# EAGLE board PCB (EAGLE 9.7.0)
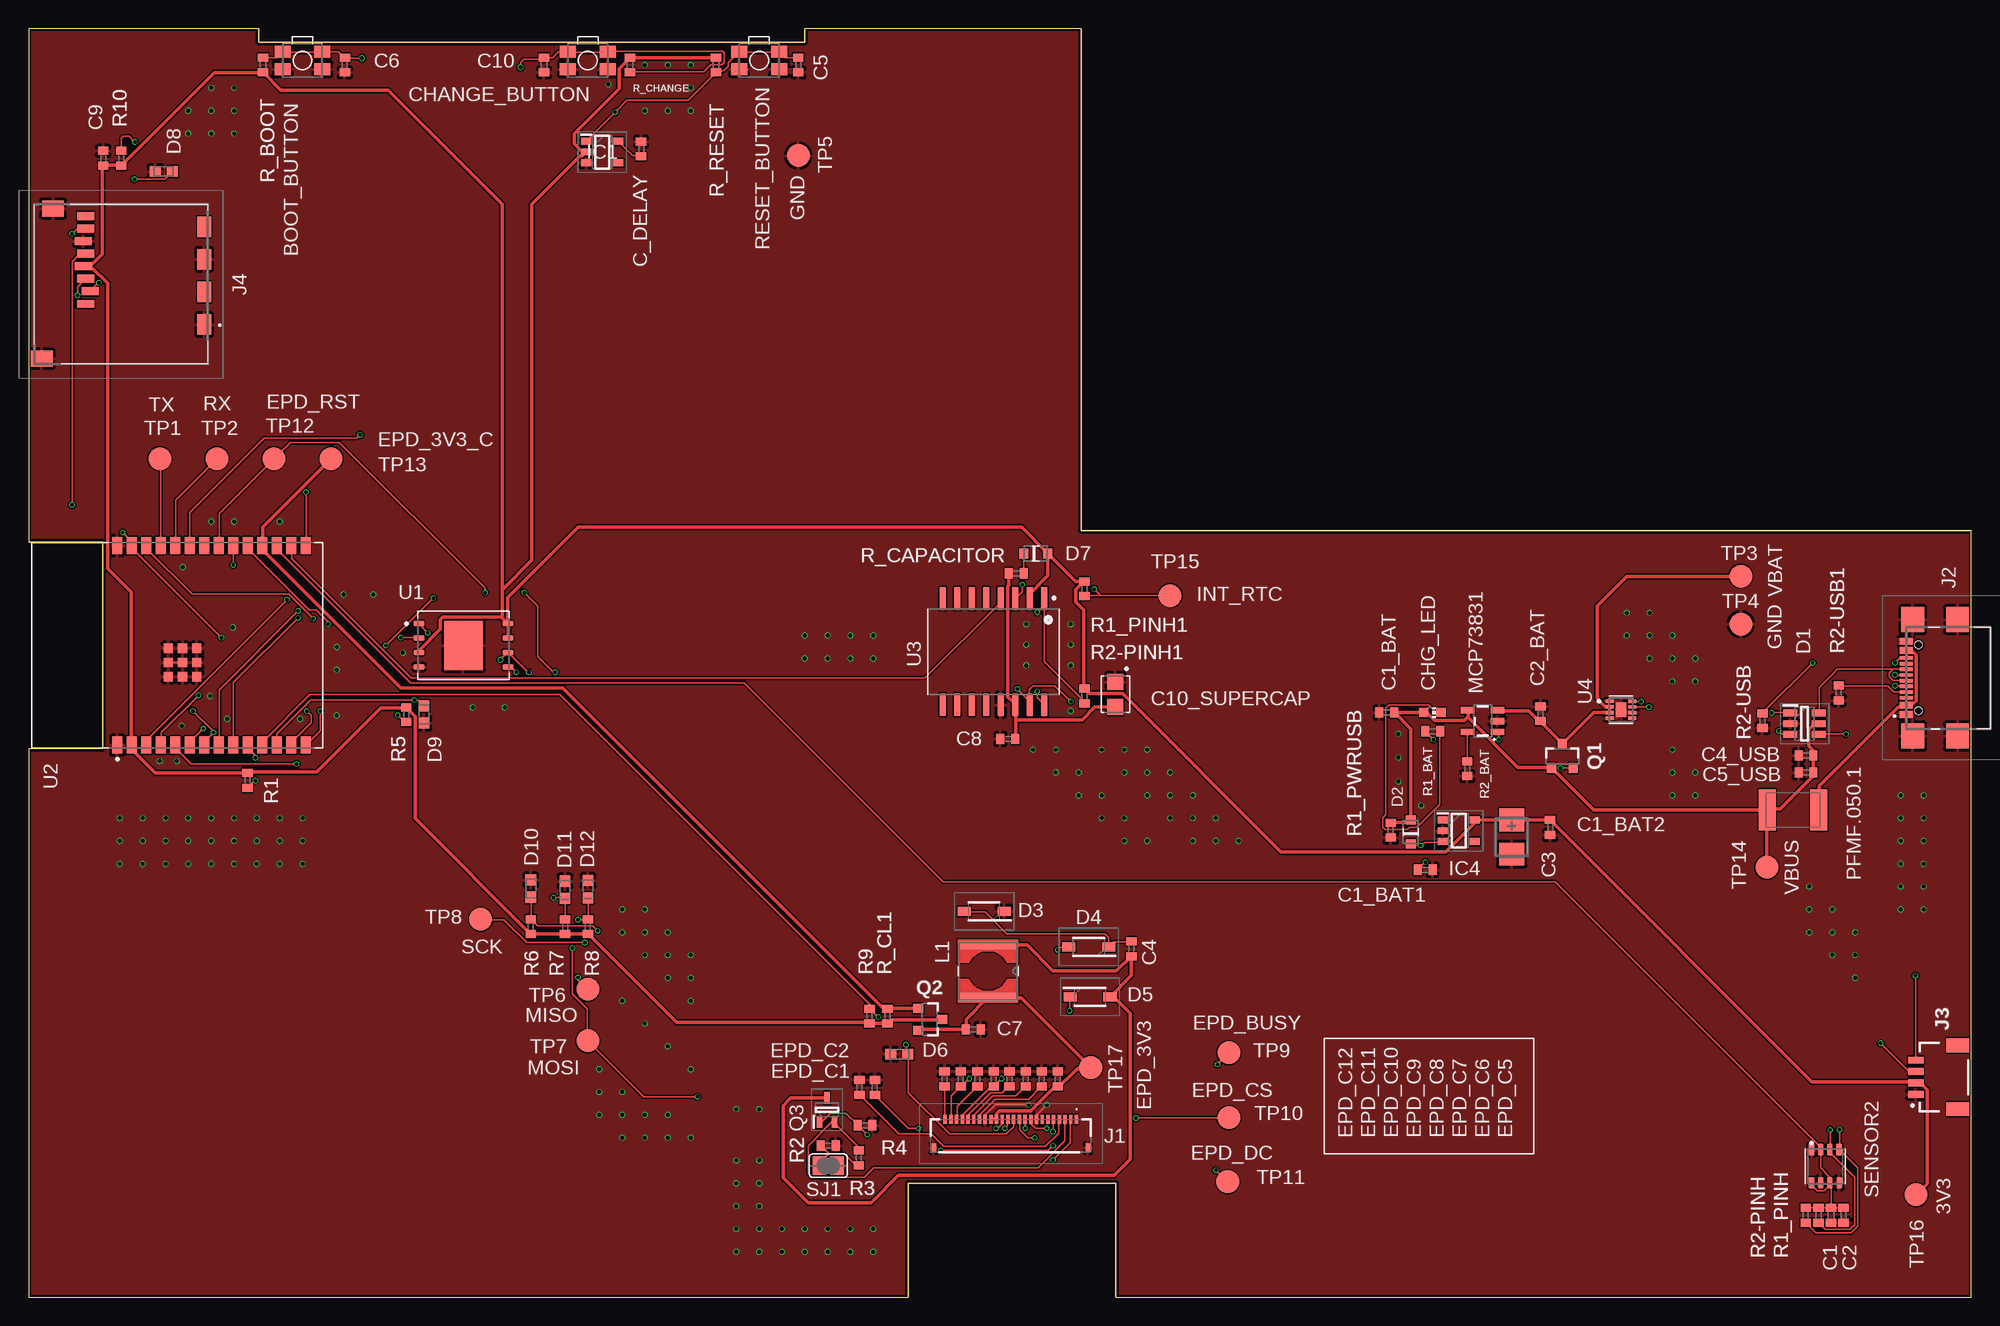
[diagram p0: board, top side]
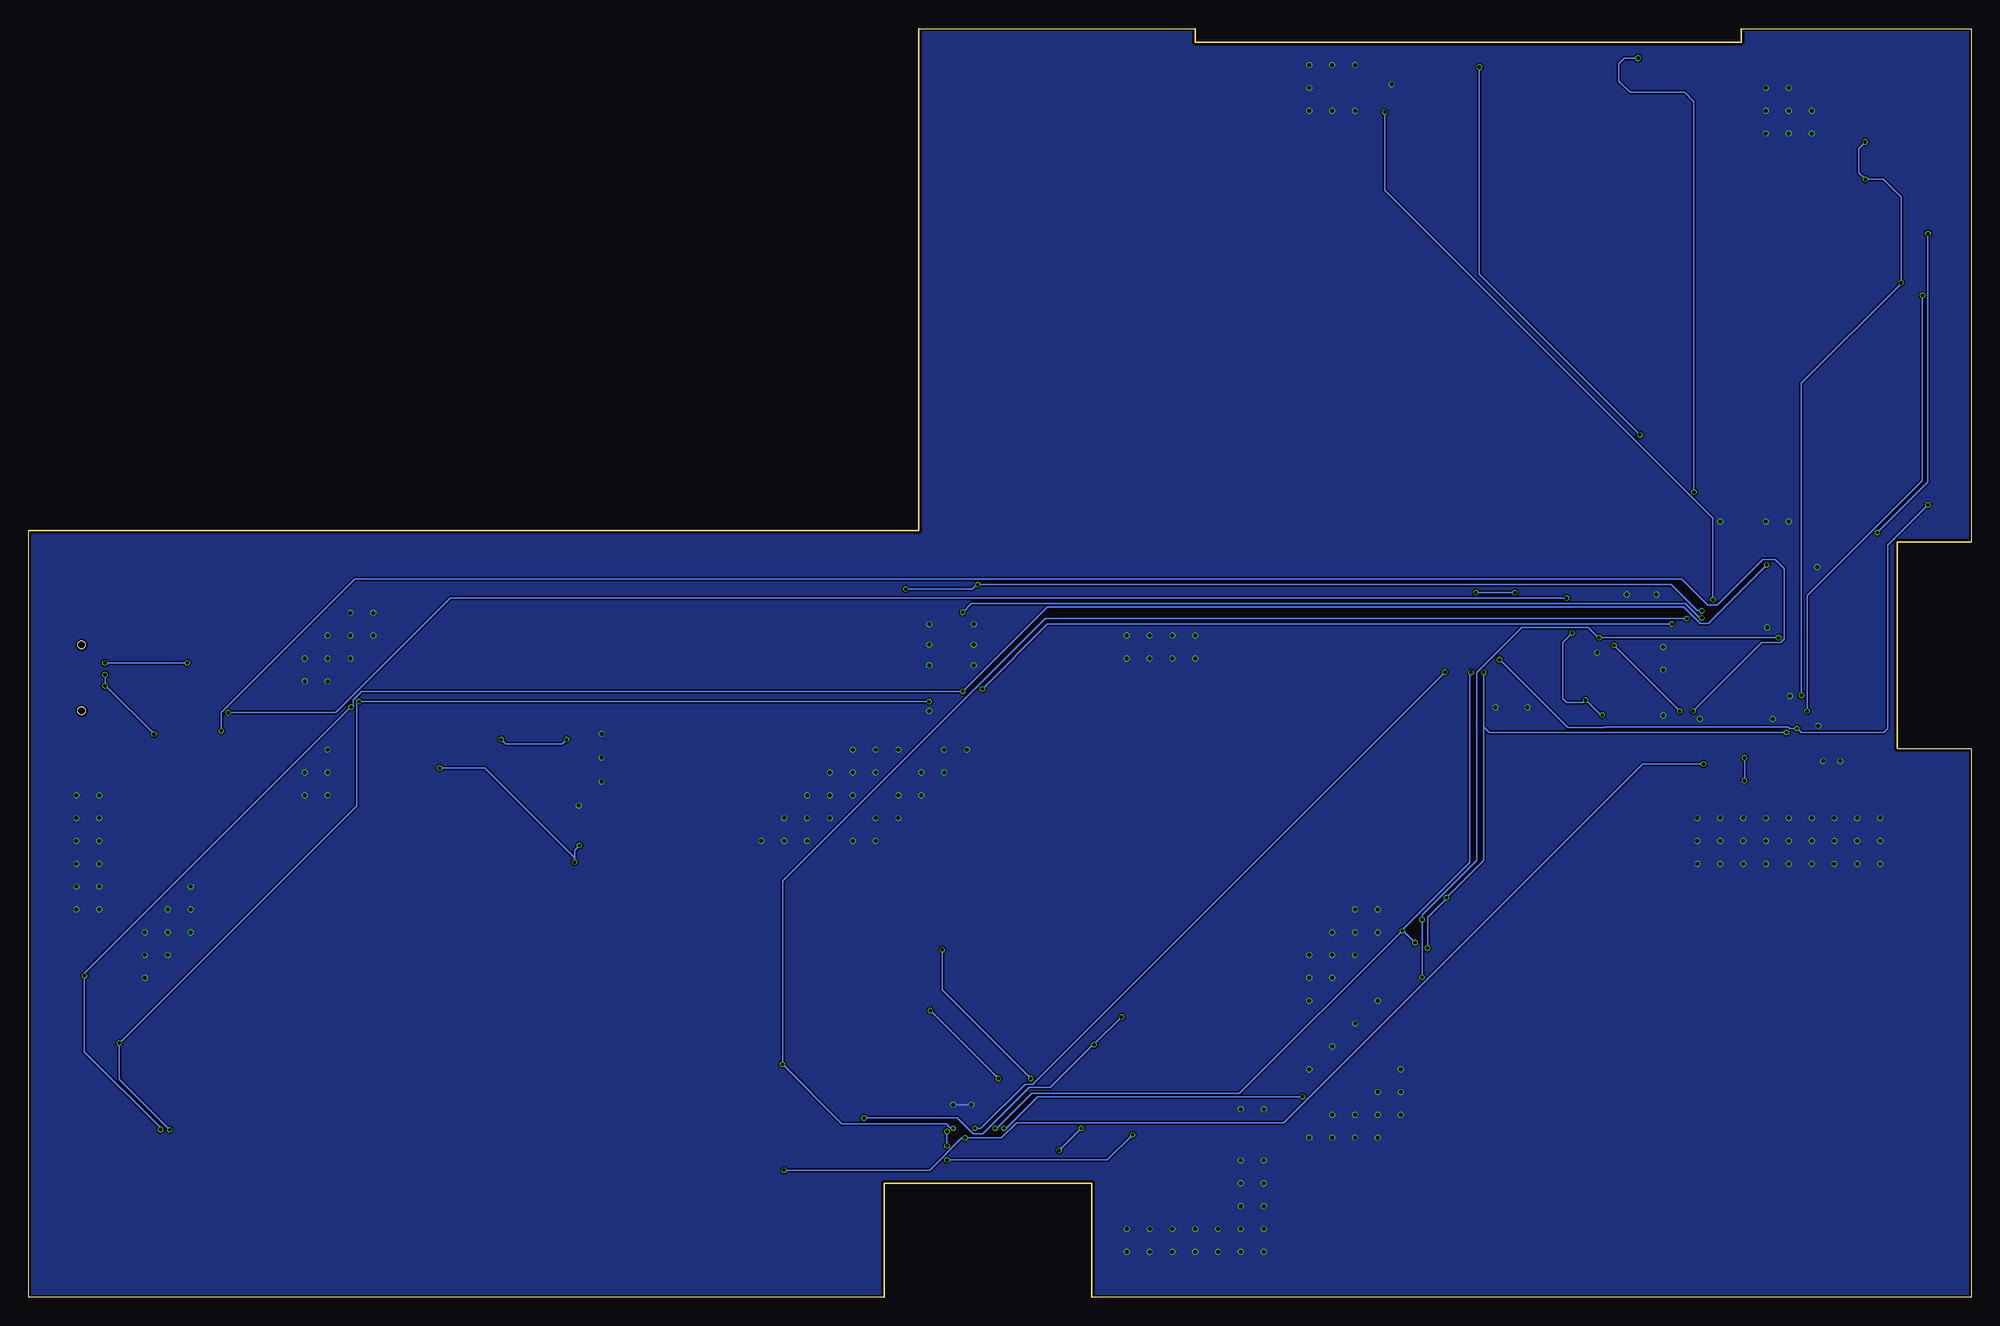
[diagram p1: board, bottom side, seen from below]

Size 170.2 x 111.2 mm. Coordinates in mm from the lower left corner, seen from the top.
Outline: 0,0 77.05,0 77.05,10 95.25,10 95.25,0 170.2,0 170.2,67.2 92.2,67.2 92.2,111.2 68,111.2 68,110 20.15,110 20.15,111.2 0,111.2 0,66.2 6.5,66.21 6.5,48.09 0,48.08 0,0
Copper layers (1*16): Top 0.035mm / dielectric 1.6mm / Bottom 0.035mm
Design rules "jlcpcb-2layers.dru *": minimum track width 5mil, minimum drill 0.3mm, track to track 5mil, track to pad 5mil, pad to pad 5mil, via to via 5mil, smd to smd 5mil, copper to edge 0.2mm, drill to drill 6mil, minimum pad ring 10mil, minimum via ring 3mil, stop-mask expansion 4mil, vias tented up to drill 0mil, thermal gap 10mil
Net classes: 0 default: width 0.15 mm; 1 POWER_NETS: width 0.3 mm

## Footprints (pad centres in the part's own frame; a part is rotated, then mirrored left to right if it is on the bottom)
MYBUTTON = smd 1.4 x 1.05: 1 1.75,0.75; 2 -1.75,0.75; 3 -1.75,-0.75; 4 1.75,-0.75
ESP32_WROVER_EAGLE-LTSPICE_C0402 = smd 0.7 x 0.9: 1 -0.65,0; 2 0.65,0
RCL_CT3528 = smd 2 x 2.2: + -1.5,0; - 1.5,0
CAPCP3225X100N = smd 1.4 x 1.4: 1 -1.1,0; 2 1.1,0
ADAFRUIT_CHIP-LED0603 = smd 0.8 x 0.8: A 0,-0.75; C 0,0.75
SOT95P280X145-6N = smd 1.2 x 0.6: 1 -1.25,0.95; 2 -1.25,0; 3 -1.25,-0.95; 4 1.25,-0.95; 5 1.25,0; 6 1.25,0.95
ESP32_WROVER_AVX---SD0805S020S1R0_AVX_SD0805S020S1R0_0 = smd 0.8 x 0.9: 1 -1.05,0; 2 1.05,0
SOD3716X135N = smd 1.15 x 0.8: 1 -1.75,0; 2 1.75,0
DIOC1608X36N = smd 0.97 x 0.94: 1 -0.75,0; 2 0.75,0
SOT95P280X125-5N = smd 0.9 x 0.6: 1 -1.4,0.95; 2 -1.4,0; 3 -1.4,-0.95; 4 1.4,-0.95; 5 1.4,0.95
SOT95P280X120-5N = smd 0.9 x 0.6: 1 -1.4,0.95; 2 -1.4,0; 3 -1.4,-0.95; 4 1.4,-0.95; 5 1.4,0.95
FH34SRJ24S05SH99 = smd 0.3 x 0.8: 1 5.75,1.45; 2 5.25,1.45; 3 4.75,1.45; 4 4.25,1.45; 5 3.75,1.45; 6 3.25,1.45; 7 2.75,1.45; 8 2.25,1.45; 9 1.75,1.45; 10 1.25,1.45; 11 0.75,1.45; 12 0.25,1.45; 13 -0.25,1.45; 14 -0.75,1.45; 15 -1.25,1.45; 16 -1.75,1.45; 17 -2.25,1.45; 18 -2.75,1.45; 19 -3.25,1.45; 20 -3.75,1.45; 21 -4.25,1.45; 22 -4.75,1.45; 23 -5.25,1.45; 24 -5.75,1.45 | smd 0.4 x 0.8: MP1 6.75,-1.05; MP2 -6.75,-1.05
SAMACSYS_PARTS_USB4110GFA = smd 0.3 x 1.15: A1 -3.35,3.678; A4 -2.55,3.678; A5 -1.25,3.678; A6 -0.25,3.678; A7 0.25,3.678; A8 1.25,3.678; A9 2.55,3.678; A12 3.35,3.678; B1 3.05,3.678; B4 2.25,3.678; B5 1.75,3.678; B6 0.75,3.678; B7 -0.75,3.678; B8 -1.75,3.678; B9 -2.25,3.678; B12 -3.05,3.678 | smd 2.18 x 2: MP1 -5.11,-0.827; MP2 5.11,-0.827; MP3 -5.11,3.103; MP4 5.11,3.103 | hole 0.65: -2.89,2.603; 2.89,2.603
JST04_1MM_RA = smd 0.6 x 1.35: 1 -1.5,0; 2 -0.5,0; 3 0.5,0; 4 1.5,0 | smd 1.2 x 2: NC1 2.8,-3.675; NC2 -2.8,-3.675
112ATAARR03ATTEND = smd 1.8 x 1.2: G1 10.6,10.4; G2 4.9,10.4; S1 7.75,10.4; S2 2.05,10.4 | smd 1.4 x 1.9: G3 13.6,-3.85; G4 0.45,-2.85 | smd 0.7 x 1.5: P1 8.8,0; P2 7.7,0.4; P3 6.6,0; P4 5.5,-0.2; P5 4.4,0; P6 3.3,-0.2; P7 2.2,0; P8 1.1,0
IND_4828-WE-TPC_WRE = smd 0.762 x 5.08: 1 -2.286,0; 2 2.286,0
ESP32_WROVER_SPARKFUN-IC-POWER_SOT23-5 = smd 0.55 x 1.2: 1 -0.95,-1.3; 2 0,-1.3; 3 0.95,-1.3; 4 0.95,1.3; 5 -0.95,1.3
ESP32C6_VARISTOR_CT/CN1812 = smd 1.5 x 3.6: 1 -2.25,0; 2 2.25,0
ESP32_WROVER_SPARKFUN-DISCRETESEMI_SOT23-3 = smd 0.8 x 0.9: 1 -0.95,-1; 2 0.95,-1; 3 0,1.1
SOT65P210X110-3N = smd 1.05 x 0.5: 1 -1.05,0.65; 2 -1.05,-0.65; 3 1.05,0
ESP32_WROVER_EAGLE-LTSPICE_R0402 = smd 0.7 x 0.9: 1 -0.65,0; 2 0.65,0
ESP32_WROVER_BME680_PSON80P300X300X100-8N = smd 1.016 x 0.5: 1 1.458,1.2; 2 1.458,0.4; 3 1.458,-0.4; 4 1.458,-1.2; 5 -1.458,-1.22; 6 -1.458,-0.4; 7 -1.458,0.4; 8 -1.458,1.2
SJ = smd 1.168 x 1.6: 1 -0.762,0; 2 0.762,0
TP20R = smd 2 x 2: TP 0,0
SON127P600X800X80-9N = smd 0.94 x 0.44: 1 -3.895,1.905; 2 -3.895,0.635; 3 -3.895,-0.635; 4 -3.895,-1.905; 5 3.895,-1.905; 6 3.895,-0.635; 7 3.895,0.635; 8 3.895,1.905 | smd 3.4 x 4.3: 9 0,0
XCVR_ESP32-C6-WROOM-1-N8 = smd 1.5 x 0.9: 1 -8.75,5.26; 2 -8.75,3.99; 3 -8.75,2.72; 4 -8.75,1.45; 5 -8.75,0.18; 6 -8.75,-1.09; 7 -8.75,-2.36; 8 -8.75,-3.63; 9 -8.75,-4.9; 10 -8.75,-6.17; 11 -8.75,-7.44; 12 -8.75,-8.71; 13 -8.75,-9.98; 14 -8.75,-11.25; 15 8.75,-11.25; 16 8.75,-9.98; 17 8.75,-8.71; 18 8.75,-7.44; 19 8.75,-6.17; 20 8.75,-4.9; 21 8.75,-3.63; 22 8.75,-2.36; 23 8.75,-1.09; 24 8.75,0.18; 25 8.75,1.45; 26 8.75,2.72; 27 8.75,3.99; 28 8.75,5.26 | smd 0.8 x 0.8: 29_1 -2.755,0.79; 29_2 -1.505,0.79; 29_3 -0.255,0.79; 29_4 -2.755,-0.46; 29_5 -1.505,-0.46; 29_6 -0.255,-0.46; 29_7 -2.755,-1.71; 29_8 -1.505,-1.71; 29_9 -0.255,-1.71
SOIC127P1032X265-16N = smd 2.05 x 0.59: 1 -4.655,4.445; 2 -4.655,3.175; 3 -4.655,1.905; 4 -4.655,0.635; 5 -4.655,-0.635; 6 -4.655,-1.905; 7 -4.655,-3.175; 8 -4.655,-4.445; 9 4.655,-4.445; 10 4.655,-3.175; 11 4.655,-1.905; 12 4.655,-0.635; 13 4.655,0.635; 14 4.655,1.905; 15 4.655,3.175; 16 4.655,4.445
SON50P200X200X80-9N = smd 0.76 x 0.27: 1 -0.985,0.75; 4 -0.985,-0.75; 5 0.985,-0.75; 6 0.985,-0.25; 7 0.985,0.25; 8 0.985,0.75 | smd 0.76 x 0.3: 2 -0.985,0.25; 3 -0.985,-0.25 | smd 0.9 x 1.3: 9 0,0

## Placement (x,y rotation side)
BOOT_BUTTON  BUTTON_CUSYOMV1  [MYBUTTON]  24,108.4 180 top
C1  100nF  [ESP32_WROVER_EAGLE-LTSPICE_C0402]  157.9,7.2 270 top
C1_BAT  4.7uF  [ESP32_WROVER_EAGLE-LTSPICE_C0402]  118.99,51.26 180 top
C1_BAT1  4.7uF  [ESP32_WROVER_EAGLE-LTSPICE_C0402]  122.35,37.48 0 top
C1_BAT2  4.7uF  [ESP32_WROVER_EAGLE-LTSPICE_C0402]  133.29,41.18 270 top
C2  100nF  [ESP32_WROVER_EAGLE-LTSPICE_C0402]  159,7.2 270 top
C2_BAT  4.7uF  [ESP32_WROVER_EAGLE-LTSPICE_C0402]  132.45,51.16 90 top
C3  100uF  [RCL_CT3528]  129.93,40.34 270 top
C4  4.7uF/25V  [ESP32_WROVER_EAGLE-LTSPICE_C0402]  96.61,30.55 270 top
C4_USB  100nF  [ESP32_WROVER_EAGLE-LTSPICE_C0402]  155.7,47.5 180 top
C5  1uF  [ESP32_WROVER_EAGLE-LTSPICE_C0402]  67.43,108 270 top
C5_USB  4.7uF  [ESP32_WROVER_EAGLE-LTSPICE_C0402]  155.7,46 180 top
C6  100nF  [ESP32_WROVER_EAGLE-LTSPICE_C0402]  27.71,108 270 top
C7  10uF  [ESP32_WROVER_EAGLE-LTSPICE_C0402]  82.75,23.49 0 top
C8  100nF  [ESP32_WROVER_EAGLE-LTSPICE_C0402]  85.79,48.94 180 top
C9  100nF  [ESP32_WROVER_EAGLE-LTSPICE_C0402]  6.55,99.83 90 top
C10  100nF  [ESP32_WROVER_EAGLE-LTSPICE_C0402]  45.15,108 270 top
C10_SUPERCAP  CPH3225A  [CAPCP3225X100N]  95.2,52.85 270 top
C_DELAY  100nF  [ESP32_WROVER_EAGLE-LTSPICE_C0402]  53.66,100.65 90 top
CHANGE_BUTTON  BUTTON_CUSYOMV1  [MYBUTTON]  49,108.4 180 top
CHG_LED  [ADAFRUIT_CHIP-LED0603]  122.98,51.25 270 top
D1  USBLC6-2SC6Y  [SOT95P280X145-6N]  155.58,50.28 0 top
D2  ESP32_WROVER_AVX---SD0805S020S1R0_AVX_SD0805S020S1R0_0_0AVX_SD0805S020S1R0_0_0  [ESP32_WROVER_AVX---SD0805S020S1R0_AVX_SD0805S020S1R0_0]  121.09,40.79 90 top
D3  MBR0530  [SOD3716X135N]  83.71,33.83 180 top
D4  MBR0530  [SOD3716X135N]  92.87,30.72 180 top
D5  MBR0530  [SOD3716X135N]  92.99,26.34 0 top
D6  PGB1010603MR  [DIOC1608X36N]  76.28,21.33 0 top
D7  ESP32_WROVER_AVX---SD0805S020S1R0_AVX_SD0805S020S1R0_0_0AVX_SD0805S020S1R0_0_0  [ESP32_WROVER_AVX---SD0805S020S1R0_AVX_SD0805S020S1R0_0]  88.24,65.19 0 top
D8  PGB1010603MR  [DIOC1608X36N]  11.85,98.67 0 top
D9  PGB1010603MR  [DIOC1608X36N]  34.64,51.08 90 top
D10  PGB1010603MR  [DIOC1608X36N]  44,35.83 270 top
D11  PGB1010603MR  [DIOC1608X36N]  47,35.73 270 top
D12  PGB1010603MR  [DIOC1608X36N]  49,35.78 270 top
EPD_C1  1uF/50V  [ESP32_WROVER_EAGLE-LTSPICE_C0402]  72.79,18.41 90 top
EPD_C2  1uF/50V  [ESP32_WROVER_EAGLE-LTSPICE_C0402]  74.14,18.41 90 top
EPD_C5  0.1uF/50V  [ESP32_WROVER_EAGLE-LTSPICE_C0402]  90.15,19.15 90 top
EPD_C6  1uF/50V  [ESP32_WROVER_EAGLE-LTSPICE_C0402]  88.75,19.15 90 top
EPD_C7  1uF/50V  [ESP32_WROVER_EAGLE-LTSPICE_C0402]  87.36,19.15 90 top
EPD_C8  1uF/50V  [ESP32_WROVER_EAGLE-LTSPICE_C0402]  85.93,19.15 90 top
EPD_C9  1uF/50V  [ESP32_WROVER_EAGLE-LTSPICE_C0402]  84.54,19.15 90 top
EPD_C10  1uF/50V  [ESP32_WROVER_EAGLE-LTSPICE_C0402]  83.12,19.15 90 top
EPD_C11  1uF/50V  [ESP32_WROVER_EAGLE-LTSPICE_C0402]  81.66,19.15 90 top
EPD_C12  1uF/50V  [ESP32_WROVER_EAGLE-LTSPICE_C0402]  80.25,19.15 90 top
IC1  BD5229G-TR  [SOT95P280X125-5N]  50.25,100.38 0 top
IC4  XC6220A331MR-G  [SOT95P280X120-5N]  125.28,40.9 0 top
J1  FH34SRJ-24S-0.5SH_99_  [FH34SRJ24S05SH99]  86.05,14.15 0 top
J2  SAMACSYS_PARTS_USB4110-GF-A  [SAMACSYS_PARTS_USB4110GFA]  168.16,54.3 90 top
J3  QWIIC_RIGHT_ANGLE  [JST04_1MM_RA]  165.32,19.3 90 top
J4  112A-TAAR-R03_ATTEND  [112ATAARR03ATTEND]  5,95.87 270 top
L1  68uH  [IND_4828-WE-TPC_WRE]  84.05,28.6 270 top
MCP73831  ESP32_WROVER_SPARKFUN-IC-POWER_MCP73831  [ESP32_WROVER_SPARKFUN-IC-POWER_SOT23-5]  127.38,50.5 90 top
PFMF.050.1  ESP32C6_VARISTORCN1812  [ESP32C6_VARISTOR_CT/CN1812]  154.57,42.72 180 top
Q1  20V/4.2A/52mΩ/1.4W  [ESP32_WROVER_SPARKFUN-DISCRETESEMI_SOT23-3]  134.36,47.41 0 top
Q2  20V/4.2A/52mΩ/1.4W  [ESP32_WROVER_SPARKFUN-DISCRETESEMI_SOT23-3]  78.93,24.37 270 top
Q3  SI1308EDL-T1-GE3  [SOT65P210X110-3N]  69.94,16.44 90 top
R1  10K  [ESP32_WROVER_EAGLE-LTSPICE_R0402]  19.19,45.32 270 top
R1_BAT  200  [ESP32_WROVER_EAGLE-LTSPICE_R0402]  123.01,49.61 0 top
R1_PINH  10K  [ESP32_WROVER_EAGLE-LTSPICE_R0402]  156.8,7.2 90 top
R1_PINH1  10K  [ESP32_WROVER_EAGLE-LTSPICE_R0402]  92.5,62.1 90 top
R1_PWRUSB  100K  [ESP32_WROVER_EAGLE-LTSPICE_R0402]  119.32,40.95 90 top
R2  2.2  [ESP32_WROVER_EAGLE-LTSPICE_R0402]  70.05,13.3 180 top
R2-PINH  10K  [ESP32_WROVER_EAGLE-LTSPICE_R0402]  155.68,7.2 90 top
R2-PINH1  10K  [ESP32_WROVER_EAGLE-LTSPICE_R0402]  92.5,52.7 90 top
R2-USB  5k1  [ESP32_WROVER_EAGLE-LTSPICE_R0402]  151.89,50.54 270 top
R2-USB1  5k1  [ESP32_WROVER_EAGLE-LTSPICE_R0402]  158.57,52.98 90 top
R2_BAT  2K  [ESP32_WROVER_EAGLE-LTSPICE_R0402]  126.03,46.34 90 top
R3  0.47  [ESP32_WROVER_EAGLE-LTSPICE_R0402]  72.72,12.25 270 top
R4  10K  [ESP32_WROVER_EAGLE-LTSPICE_R0402]  73.27,15.1 0 top
R5  10K  [ESP32_WROVER_EAGLE-LTSPICE_R0402]  33.08,51.07 90 top
R6  10K  [ESP32_WROVER_EAGLE-LTSPICE_R0402]  44,32.5 270 top
R7  10K  [ESP32_WROVER_EAGLE-LTSPICE_R0402]  47,32.5 270 top
R8  10K  [ESP32_WROVER_EAGLE-LTSPICE_R0402]  49,32.5 270 top
R9  10K  [ESP32_WROVER_EAGLE-LTSPICE_R0402]  73.68,24.65 270 top
R10  10K  [ESP32_WROVER_EAGLE-LTSPICE_R0402]  8.13,99.83 270 top
R_BOOT  10K  [ESP32_WROVER_EAGLE-LTSPICE_R0402]  20.54,108 90 top
R_CAPACITOR  15  [ESP32_WROVER_EAGLE-LTSPICE_R0402]  86.52,63.45 0 top
R_CHANGE  10K  [ESP32_WROVER_EAGLE-LTSPICE_R0402]  52.69,108 270 top
R_CL1  10K  [ESP32_WROVER_EAGLE-LTSPICE_R0402]  75.25,24.65 90 top
R_RESET  10K  [ESP32_WROVER_EAGLE-LTSPICE_R0402]  60.22,108 270 top
RESET_BUTTON  BUTTON_CUSYOMV1  [MYBUTTON]  64,108.4 180 top
SENSOR2  ESP32_WROVER_BME680_BME680  [ESP32_WROVER_BME680_PSON80P300X300X100-8N]  157.39,11.5 90 top
SJ1  [SJ]  70.06,11.55 180 top
TP1  TPTP20R  [TP20R]  11.5,73.5 0 top
TP2  TPTP20R  [TP20R]  16.5,73.5 0 top
TP3  TPTP20R  [TP20R]  150,63.2 0 top
TP4  TPTP20R  [TP20R]  150,59 0 top
TP5  TPTP20R  [TP20R]  67.43,100.06 0 top
TP6  TPTP20R  [TP20R]  49,27 0 top
TP7  TPTP20R  [TP20R]  49,22.5 0 top
TP8  TPTP20R  [TP20R]  39.6,33.15 0 top
TP9  TPTP20R  [TP20R]  105.15,21.45 0 top
TP10  TPTP20R  [TP20R]  105.15,15.75 0 top
TP11  TPTP20R  [TP20R]  105.05,10.15 0 top
TP12  TPTP20R  [TP20R]  21.5,73.5 0 top
TP13  TPTP20R  [TP20R]  26.5,73.5 0 top
TP14  TPTP20R  [TP20R]  152.28,37.7 0 top
TP15  TPTP20R  [TP20R]  100,61.5 0 top
TP16  TPTP20R  [TP20R]  165.35,9 0 top
TP17  TPTP20R  [TP20R]  93.05,20.15 0 top
U1  W25Q512JVEIQ  [SON127P600X800X80-9N]  38.1,57.15 0 top
U2  ESP32-C6-WROOM-1-N8  [XCVR_ESP32-C6-WROOM-1-N8]  13.03,57.15 90 top
U3  DS3231SN#  [SOIC127P1032X265-16N]  84.53,56.59 270 top
U4  MAX17048G+T10  [SON50P200X200X80-9N]  139.5,51.5 0 top

## Library data of the parts
BOOT_BUTTON C1_BAT C1_BAT1 C1_BAT2 C2_BAT C4 C5_USB CHANGE_BUTTON CHG_LED EPD_C1 EPD_C2 EPD_C6-EPD_C12 PFMF.050.1 R1_BAT R1_PWRUSB R2-USB R2-USB1 RESET_BUTTON SJ1 TP1-TP17 = DeskAssistant v19 v1
C1 C2 C4_USB C5-C10 C_DELAY EPD_C5 = DeskAssistant v19 v1; SPICEMODEL: NONE; SPICEPREFIX: C
C3 = DeskAssistant v19 v1; SPICEPREFIX: C
C10_SUPERCAP = DeskAssistant v19 v1; AVAILABILITY: Not in stock; CHECK_PRICES: https://www.snapeda.com/parts/CPH3225A/Seiko+Instruments/view-part/?ref=eda; DESCRIPTION: 11 mF (EDLC) Supercapacitor 3.3 V 1210 (3225 Metric) - -; MF: Seiko Instruments; MP: CPH3225A; PACKAGE: 1210 Seiko; PRICE: None; PURCHASE-URL: https://www.snapeda.com/api/url_track_click_mouser/?unipart_id=562593&manufacturer=Seiko Instruments&part_name=CPH3225A&search_term=None; SNAPEDA_LINK: https://www.snapeda.com/parts/CPH3225A/Seiko+Instruments/view-part/?ref=snap
D1 = DeskAssistant v19 v1; AVAILABILITY: In Stock; CHECK_PRICES: https://www.snapeda.com/parts/USBLC6-2SC6Y/STMicroelectronics/view-part/?ref=eda; DESCRIPTION: 17V Clamp 5A (8/20µs) Ipp Tvs Diode Surface Mount SOT-23-6; MF: STMicroelectronics; MP: USBLC6-2SC6Y; PACKAGE: SOT-23-6 STMicroelectronics; PRICE: None; SNAPEDA_LINK: https://www.snapeda.com/parts/USBLC6-2SC6Y/STMicroelectronics/view-part/?ref=snap
D2 D7 = DeskAssistant v19 v1; CENTROID_NOT_SPECIFIED: No; DATASHEET: http://datasheets.avx.com/schottky.pdf; DIGIKEY_DESCRIPTION: DIODE SCHOTTKY 20V 1A 0805; DIGIKEY_PART_NUMBER: 478-7800-1-ND; LEAD_FREE: yes; MF: AVX; MOUSER_PART_NUMBER: 581-SD0805S020S1R0; PACKAGE: 0805 (2012 metric); PREFIX: D; ROHS: yes; TEMPERATURE_RANGE_HIGH: +125°C; TEMPERATURE_RANGE_LOW: -55°C
D3-D5 = DeskAssistant v19 v1; AVAILABILITY: In Stock; CHECK_PRICES: https://www.snapeda.com/parts/MBR0530/Onsemi/view-part/?ref=eda; DESCRIPTION: Diode Schottky 30 V 500mA Surface Mount SOD-123; MF: ON Semiconductor; MP: MBR0530; PACKAGE: SOD-123-2 ON Semiconductor; PRICE: None; PURCHASE-URL: https://www.snapeda.com/api/url_track_click_mouser/?unipart_id=179458&manufacturer=ON Semiconductor&part_name=MBR0530&search_term=None; SNAPEDA_LINK: https://www.snapeda.com/parts/MBR0530/Onsemi/view-part/?ref=snap
D6 D8-D12 = DeskAssistant v19 v1; AVAILABILITY: In Stock; CHECK_PRICES: https://www.snapeda.com/parts/PGB1010603MR/Littelfuse/view-part/?ref=eda; DESCRIPTION: 150V (Typ) Clamp - Ipp Tvs Diode Surface Mount 0603 (1608 Metric); MF: Littelfuse Inc.; MP: PGB1010603MR; PACKAGE: 0603 Littelfuse Inc.; PRICE: None; PURCHASE-URL: https://www.snapeda.com/api/url_track_click_mouser/?unipart_id=5659453&manufacturer=Littelfuse Inc.&part_name=PGB1010603MR&search_term=None; SNAPEDA_LINK: https://www.snapeda.com/parts/PGB1010603MR/Littelfuse/view-part/?ref=snap
IC1 = DeskAssistant v19 v1; DESCRIPTION: Voltage Detector with Adjustable Delay Time: CMOS processes are utilized to develop high precision, low current consumption CMOS reset ICs that allow arbitrary setting of the delay time. The extensive lineup includes both Nch Open Drain and CMOS output types in a wide range of detection voltages (from 2.3V to 6.0V, in 0.1V steps), enabling selection of the ideal solution based on customer requirements. In addition, the entire series is of course both lead-free and RoHS-compliant.; HEIGHT: 1.25mm; MANUFACTURER_NAME: ROHM Semiconductor; MANUFACTURER_PART_NUMBER: BD5229G-TR; MOUSER_PART_NUMBER: 755-BD5229G-TR; MOUSER_PRICE-STOCK: https://www.mouser.co.uk/ProductDetail/ROHM-Semiconductor/BD5229G-TR?qs=4kLU8WoGk0vvnhrrYwdszw%3D%3D
IC4 = DeskAssistant v19 v1; DESCRIPTION: LDO Voltage Regulators; HEIGHT: 1.2mm; MANUFACTURER_NAME: Torex; MANUFACTURER_PART_NUMBER: XC6220A331MR-G; MOUSER_PART_NUMBER: 865-XC6220A331MR-G; MOUSER_PRICE-STOCK: https://www.mouser.co.uk/ProductDetail/Torex-Semiconductor/XC6220A331MR-G?qs=AsjdqWjXhJ8ZSWznL1J0gg%3D%3D
J1 = DeskAssistant v19 v1; DESCRIPTION: 24 Position FFC, FPC Connector Contacts, Top and Bottom 0.020" (0.50mm) Surface Mount, Right Angle; HEIGHT: 1.1mm; MANUFACTURER_NAME: Hirose; MANUFACTURER_PART_NUMBER: FH34SRJ-24S-0.5SH(99); MOUSER_PART_NUMBER: 798-FH34SRJ24S05SH99; MOUSER_PRICE-STOCK: https://www.mouser.co.uk/ProductDetail/Hirose-Connector/FH34SRJ-24S-0.5SH99?qs=vcbW%252B4%252BSTIpKBl5ap9J8Fw%3D%3D
J2 = DeskAssistant v19 v1; DESCRIPTION: CONN USB 2.0 TYPE-C R/A SMT; HEIGHT: 3.26mm; MANUFACTURER_NAME: GCT (GLOBAL CONNECTOR TECHNOLOGY); MANUFACTURER_PART_NUMBER: USB4110-GF-A; MOUSER_PART_NUMBER: 640-USB4110-GF-A; MOUSER_PRICE-STOCK: https://www.mouser.co.uk/ProductDetail/GCT/USB4110-GF-A?qs=KUoIvG%2F9IlYiZvIXQjyJeA%3D%3D
J3 = DeskAssistant v19 v1; PROD_ID: CONN-13694
J4 = DeskAssistant v19 v1; DESCRIPTION: Micro SD Card Socket, Push-Push Type, Top Mount, SMT, H=1.83mm, 10u; HEIGHT: 1.9mm; MANUFACTURER_NAME: ATTEND; MANUFACTURER_PART_NUMBER: 112A-TAAR-R03 ATTEND
L1 = DeskAssistant v19 v1; COPYRIGHT: Copyright (C) 2024 Ultra Librarian. All rights reserved.; MANUFACTURER_PART_NUMBER: 744043680; MFR_NAME: Wurth Electronics
MCP73831 = DeskAssistant v19 v1; PROD_ID: IC-09995
Q1 Q2 = DeskAssistant v19 v1; PROD_ID: TRAN-14388
Q3 = DeskAssistant v19 v1; AVAILABILITY: In Stock; CHECK_PRICES: https://www.snapeda.com/parts/SI1308EDL-T1-GE3/Vishay+Siliconix/view-part/?ref=eda; DESCRIPTION: Si1308EDL-T1-GE3 N-channel MOSFET Transistor, 1.5 A, 30 V, 3-Pin SC-70 | Siliconix / Vishay SI1308EDL-T1-GE3; MF: Vishay Siliconix; MP: SI1308EDL-T1-GE3; PACKAGE: SOT-323 Vishay Semiconductor; PRICE: None; PURCHASE-URL: https://www.snapeda.com/api/url_track_click_mouser/?unipart_id=274603&manufacturer=Vishay Siliconix&part_name=SI1308EDL-T1-GE3&search_term=None; SNAPEDA_LINK: https://www.snapeda.com/parts/SI1308EDL-T1-GE3/Vishay+Siliconix/view-part/?ref=snap
R1 R1_PINH R1_PINH1 R2 R2-PINH R2-PINH1 R2_BAT R3-R10 R_BOOT R_CAPACITOR R_CHANGE R_CL1 R_RESET = DeskAssistant v19 v1; SPICEMODEL: NONE; SPICEPREFIX: R
SENSOR2 = DeskAssistant v19 v1; AVAILABILITY: Unavailable; DESCRIPTION: Integrated Environmental Unit; MF: Bosch Sensortec; MP: BME680; PACKAGE: LGA-8 Bosch Tools; PRICE: None
U1 = DeskAssistant v19 v1; AVAILABILITY: In Stock; CHECK_PRICES: https://www.snapeda.com/parts/W25Q512JVEIQ/Winbond+Electronics/view-part/?ref=eda; DESCRIPTION: FLASH - NOR Memory IC 512Mb (64M x 8) SPI - Quad I/O 133 MHz 8-WSON (8x6); MF: Winbond Electronics; MP: W25Q512JVEIQ; PACKAGE: Package; PRICE: None; SNAPEDA_LINK: https://www.snapeda.com/parts/W25Q512JVEIQ/Winbond+Electronics/view-part/?ref=snap
U2 = DeskAssistant v19 v1; AVAILABILITY: In Stock; CHECK_PRICES: https://www.snapeda.com/parts/ESP32-C6-WROOM-1-N8/Espressif+Systems/view-part/?ref=eda; DESCRIPTION: Multiprotocol Modules ESP32-C6 module, Wi-Fi 6 in 2.4 GHz band, Bluetooth 5, Zigbee 3.0 and Thread. ESP34-WROOM Compatible - ENGINEERING SAMPLE; MF: Espressif Systems; MP: ESP32-C6-WROOM-1-N8; PACKAGE: None; PRICE: None; SNAPEDA_LINK: https://www.snapeda.com/parts/ESP32-C6-WROOM-1-N8/Espressif+Systems/view-part/?ref=snap
U3 = DeskAssistant v19 v1; AVAILABILITY: In Stock; CHECK_PRICES: https://www.snapeda.com/parts/DS3231SN%23/Analog+Devices/view-part/?ref=eda; DESCRIPTION: Extremely Accurate I²C-Integrated RTC/TCXO/Crystal; MF: Analog Devices; MP: DS3231SN#; PACKAGE: SOIC-16 Maxim; PRICE: None; PURCHASE-URL: https://www.snapeda.com/api/url_track_click_mouser/?unipart_id=99048&manufacturer=Analog Devices&part_name=DS3231SN#&search_term=None; SNAPEDA_LINK: https://www.snapeda.com/parts/DS3231SN%23/Analog+Devices/view-part/?ref=snap
U4 = DeskAssistant v19 v1; AVAILABILITY: In Stock; CHECK_PRICES: https://www.snapeda.com/parts/MAX17048G+T10/Analog+Devices/view-part/?ref=eda; DESCRIPTION: 3µA 1-Cell/2-Cell Fuel Gauge with ModelGauge; MF: Analog Devices; MP: MAX17048G+T10; PACKAGE: TDFN-8 Maxim; PRICE: None; PURCHASE-URL: https://www.snapeda.com/api/url_track_click_mouser/?unipart_id=329239&manufacturer=Analog Devices&part_name=MAX17048G+T10&search_term=None; SNAPEDA_LINK: https://www.snapeda.com/parts/MAX17048G+T10/Analog+Devices/view-part/?ref=snap

## Nets
3V3 [POWER_NETS]: C1_BAT2.1 C3.+ C9.1 D7.2 IC1.2 IC4.5 J3.2 J4.P4 Q2.3 R1.1 R1_PINH1.2 R2-PINH1.2 R5.2 R6.2 R7.2 R8.2 R9.2 R10.2 R_BOOT.1 R_CHANGE.1 R_CL1.1 R_RESET.1 TP16.TP U1.3 U1.7 U1.8 U2.2 U3.2
32KHZ: R2-PINH1.1 U2.9 U3.1
DN: D1.4 J2.A7 J2.B7
DP: D1.6 J2.A6 J2.B6
EPD_3V3 [POWER_NETS]: C7.1 EPD_C5.1 J1.15 J1.16 L1.2 Q2.2 TP17.TP
EPD_3V3_C [POWER_NETS]: Q2.1 R_CL1.2 TP13.TP U2.18
EPD_BUSY: J1.9 TP9.TP U2.26
EPD_CS: D6.2 J1.12 R9.1 TP10.TP U2.11
EPD_DC: J1.11 TP11.TP U2.5
EPD_RST: J1.10 TP12.TP U2.21
FLASH_CS: D9.2 R5.1 U1.1 U2.12
GDR: J1.2 Q3.1 R4.1
GND: BOOT_BUTTON.1 BOOT_BUTTON.2 C1.2 C1_BAT1.2 C1_BAT2.2 C1_BAT.2 C2.2 C2_BAT.2 C3.- C4_USB.2 C5.2 C5_USB.2 C6.2 C7.2 C8.2 C9.2 C10.2 C10_SUPERCAP.1 C_DELAY.2 CHANGE_BUTTON.1 CHANGE_BUTTON.2 D1.2 D3.1 D6.1 D8.1 D9.1 D10.1 D11.1 D12.1 EPD_C1.2 EPD_C2.2 EPD_C5.2 EPD_C6.2 EPD_C7.2 EPD_C8.2 EPD_C9.2 EPD_C10.2 EPD_C11.2 EPD_C12.2 IC1.3 IC4.2 J1.8 J1.17 J1.MP1 J1.MP2 J2.A1 J2.A12 J2.B1 J2.B12 J2.MP1 J2.MP2 J2.MP3 J2.MP4 J3.1 J4.G1 J4.G2 J4.G3 J4.G4 J4.P6 MCP73831.2 R1_PWRUSB.1 R2-USB1.1 R2-USB.2 R2.1 R2_BAT.1 R4.2 RESET_BUTTON.1 RESET_BUTTON.2 SENSOR2.1 SENSOR2.5 SENSOR2.7 SJ1.1 TP4.TP TP5.TP U1.4 U1.9 U2.1 U2.28 U2.29_1 U2.29_2 U2.29_3 U2.29_4 U2.29_5 U2.29_6 U2.29_7 U2.29_8 U2.29_9 U3.13 U4.1 U4.4 U4.6 U4.9
GPIO8: R1.2 U2.10
I2C_PW: C1.1 C2.1 R1_PINH.2 R2-PINH.2 SENSOR2.2 SENSOR2.6 SENSOR2.8 U2.17
INT_RTC: R1_PINH1.1 TP15.TP U2.8 U3.3
IO/BOOT: BOOT_BUTTON.3 BOOT_BUTTON.4 C6.1 R_BOOT.2 U2.15
IO/CHANGE: C10.1 CHANGE_BUTTON.3 CHANGE_BUTTON.4 R_CHANGE.2 U2.23
MISO: D12.2 J4.P7 R8.1 TP6.TP U1.2 U2.27
MOSI: D11.2 J1.14 J4.P3 R7.1 TP7.TP U1.5 U2.7
N$1: D7.1 R_CAPACITOR.2
N$3: C_DELAY.1 IC1.5
N$4: MCP73831.5 R2_BAT.2
N$5: C4.1 D3.2 D4.1
N$6: C1_BAT1.1 D2.1 IC4.1 IC4.3 Q1.2
N$7: MCP73831.1 R1_BAT.1
N$8: CHG_LED.C R1_BAT.2
N$9: EPD_C1.1 J1.4
N$10: EPD_C2.1 J1.5
N$12: EPD_C6.1 J1.18
N$13: EPD_C7.1 J1.19
N$14: EPD_C8.1 J1.20
N$16: EPD_C10.1 J1.22
N$18: EPD_C12.1 J1.24
N$22: J2.A5 R2-USB1.2
N$28: J2.B5 R2-USB.1
PREVGH: D5.1 EPD_C9.1 J1.21
PREVGL: D4.2 EPD_C11.1 J1.23
RESE: J1.3 Q3.2 R3.1
RESE': R2.2 R3.2 SJ1.2
RESET: C5.1 IC1.1 R_RESET.2 RESET_BUTTON.3 RESET_BUTTON.4 U2.3
RTC_RST: U2.16 U3.4
RX: TP2.TP U2.24
SCK: D10.2 J1.13 J4.P5 R6.1 TP8.TP U1.6 U2.6
SCL: J3.4 R2-PINH.1 SENSOR2.4 U2.20 U3.16 U4.7
SDA: J3.3 R1_PINH.1 SENSOR2.3 U2.19 U3.15 U4.8
SRC [POWER_NETS]: C4.2 D5.2 L1.1 Q3.3
SS_SD: D8.2 J4.P2 R10.1 U2.4
TX: TP1.TP U2.25
USB_D+: D1.1 U2.14
USB_D-: D1.3 U2.13
VBAT [POWER_NETS]: C2_BAT.1 MCP73831.3 Q1.3 TP3.TP U4.2 U4.3
VBUS [POWER_NETS]: C1_BAT.1 C4_USB.1 C5_USB.1 CHG_LED.A D1.5 D2.2 MCP73831.4 PFMF.050.1.2 Q1.1 R1_PWRUSB.2 TP14.TP
VRTC [POWER_NETS]: C8.1 C10_SUPERCAP.2 R_CAPACITOR.1 U3.14
VUSB [POWER_NETS]: J2.A4 J2.A9 J2.B4 J2.B9 PFMF.050.1.1

## Tracks (layer width: path | path; a pad name or v marks a point on that pad's centre or on a via)
3V3
  Top 0.3: TP16.TP 165.37,9 166.34,9.97 166.34,18.21 165.78,18.77 165.37,18.77 J3.2 165.23,18.91 156.23,18.91 133.38,41.76 C1_BAT2.1 133.24,41.83 130.05,41.83 C3.+ 129.91,41.83 126.73,41.83 IC4.5 126.66,41.69 126.66,41.55 124.17,39.06 109.69,39.06 95.84,52.91 92.93,52.91 92.59,53.25 R2-PINH1.2 92.45,53.39 92.45,60.25 91.76,60.94 91.76,62.05 92.1,62.39 92.45,62.74 | 92.45,62.74 R1_PINH1.2 | U3.2 87.74,61.29 87.74,61.7 88.95,62.91 89.29,63.25 89.29,65.21 | Q2.3 79.98,24.31 75.55,24.31 75.34,24.1 R_CL1.1 75.21,24.03 73.68,24.03 R9.2 73.54,24.1 56.78,24.1 49.1,31.79 R8.2 48.96,31.86 47.09,31.86 R7.2 46.95,31.86 44.04,31.86 R6.2 43.9,31.92 33.86,41.97 33.86,50.9 33.17,51.59 R5.2 33.03,51.66 30.85,51.66 25.25,46.05 19.32,46.05 R1.1 19.18,45.98 11.08,45.98 9.07,47.99 9.07,48.34 U2.2 9,48.54 9,61.82 6.93,63.89 6.93,76.3 6.93,77.21 6.93,88.88 5.5,90.31 J4.P4 4.85,90.37 5.4,90.37 6.44,91.41 6.44,99.1 C9.1 6.58,99.23 8.1,99.23 R10.2 8.24,99.31 16.27,107.34 20.5,107.34 R_BOOT.1 22.09,105.8 23.6,105.8 31.49,105.8 41.48,95.81 41.48,77.21 | 41.41,59.62 36.29,59.62 36.08,59.42 36.08,58.59 34.21,56.72 34.21,56.58 U1.3 | 41.41,59.62 41.97,59.07 U1.8 | U1.7 42.03,57.82 42.03,58.93 U1.8 | R_RESET.1 60.18,108.65 52.84,108.65 R_CHANGE.1 51.73,107.68 51.73,106.75 51.73,105.93 51.7,105.9 50.2,104.4 47.8,102 47.8,101.1 48.52,100.38 IC1.2 48.48,100.01 48.28,100.01 44.1,95.82 44.1,64.62 41.48,62 | 41.48,77.21 41.48,62 | 41.48,77.21 41.48,64.19 41.48,62 | 41.48,62 41.48,59.76 41.41,59.62 | 89.29,65.21 D7.2 91.74,62.74 92.45,62.74 | 89.29,65.21 87,67.5 48.14,67.5 41.99,61.35 U1.8
32KHZ  (via drill 0.3)
  Top 0.15: 88.99,60.7 88.99,60.04 88.99,55.75 92.45,52.28 92.45,52.08 R2-PINH1.1 | 88.99,60.7 88.99,61.22 U3.1 | v23.61,59.55 17.94,53.88 U2.9 | v88.36,60.04 88.99,60.66 88.99,60.7
  Bottom 0.15: v23.61,59.55 23.82,59.55 25.07,60.8 87.6,60.8 v88.36,60.04
DN  (via drill 0.3)
  Top 0.15: v163.5,53.6 164.47,53.6 J2.B7 | v163.5,54.57 164.47,54.57 J2.A7 | v159.21,49.38 156.85,49.38 D1.4
  Bottom 0.15: v163.5,54.57 v163.5,53.6 163.43,53.6 v159.21,49.38
DP
  Top 0.15: 163.36,55.05 163.01,54.71 163.01,54.43 163.36,54.08 164.47,54.08 J2.A6 | 163.36,55.05 164.47,55.05 J2.B6 | D1.6 156.85,51.24 156.85,53.45 158.04,54.63 158.46,55.05 163.36,55.05
EPD_3V3
  Top 0.3: Q2.2 77.97,23.48 82.06,23.48 C7.1 82.13,23.61 82.13,24.38 84,26.25 | 84,26.25 L1.2 | J1.16 84.35,15.65 84.76,15.65 J1.15 84.83,15.79 84.83,16.14 85.04,16.34 87.81,16.34 89.96,18.49 90.09,18.49 EPD_C5.1 90.3,18.49 91.51,19.7 91.89,20.08 93.04,20.08 TP17.TP 86.95,26.25 84,26.25
EPD_3V3_C
  Top 0.3: Q2.1 77.91,25.35 75.28,25.35 R_CL1.2 75.14,25.41 74.79,25.41 46.81,53.39 32.62,53.39 20.57,65.44 20.57,65.79 U2.18 20.5,65.93 20.5,67.52 26.45,73.47 TP13.TP
EPD_BUSY  (via drill 0.3)
  Top 0.15: v89.19,14.82 88.22,14.82 87.81,15.23 87.81,15.58 J1.9 | v104.15,20.43 105.12,21.4 TP9.TP | v24.93,59.49 22.78,61.63 14.34,61.63 10.32,65.65 10.32,65.86 U2.26
  Bottom 0.15: v89.19,14.82 89.4,14.82 89.82,15.23 98.96,15.23 v104.15,20.43 104.15,36.49 81.16,59.49 v24.93,59.49
EPD_CS  (via drill 0.3)
  Top 0.15: J1.12 86.28,15.58 86.28,14.96 85.66,14.34 80.68,14.34 77.08,17.94 77.08,21.33 D6.2 77.01,21.4 76.87,21.54 v76.87,22.16 | v74.44,24.58 74.37,24.58 73.68,25.28 R9.1 73.78,25.4 73.78,25.58 46.52,52.84 24.65,52.84 20.5,48.68 20.5,48.41 U2.11 | v97.02,15.72 105.12,15.72 TP10.TP
  Bottom 0.15: v74.44,24.58 v76.87,22.16 76.94,22.16 80.68,18.42 82.55,18.42 86.63,14.34 87.46,14.34 88.85,15.72 v97.02,15.72
EPD_DC  (via drill 0.3)
  Top 0.15: v88.16,13.99 87.53,13.99 86.84,14.68 86.84,15.58 J1.11 | v104.01,11.15 104.98,10.18 TP11.TP | v23.48,46.74 14.27,46.74 12.88,48.13 12.88,48.34 U2.5
  Bottom 0.15: v104.01,11.15 91.27,11.15 88.43,13.99 v88.16,13.99 88.09,13.99 84.97,13.99 83.65,15.3 60.25,15.3 28.81,46.74 v23.48,46.74
EPD_RST  (via drill 0.3)
  Top 0.15: v87.32,14.82 87.32,15.58 J1.10 | v43.43,61.77 44.63,60.57 44.63,56.19 46.03,54.79 v46.13,54.79 | v40,61.77 40,62.17 27.2,74.92 22.91,74.92 21.54,73.54 TP12.TP 21.47,73.47 16.69,68.7 16.69,65.93 U2.21
  Bottom 0.15: v87.32,14.82 86.77,14.82 82.89,18.7 82.22,18.7 v46.13,54.79 | v40,61.77 v43.43,61.77
FLASH_CS  (via drill 0.3)
  Top 0.15: v32.34,51.04 32.89,50.48 33.03,50.48 R5.1 | D9.2 34.62,51.87 34.14,52.35 v33.79,52.35 33.73,52.35 24.72,52.35 21.74,49.38 U2.12 | v34.97,58.24 34.21,59 U1.1
  Bottom 0.15: v32.34,51.04 32.48,51.04 v33.79,52.35 33.86,52.35 34.07,52.15 35.46,52.15 35.8,52.49 35.8,57.41 v34.97,58.24
GDR  (via drill 0.3)
  Top 0.15: v89.75,12.05 91.27,13.57 91.27,15.58 J1.2 | v73.47,14.27 72.64,15.1 R4.1 72.57,15.17 71.61,16.14 70.22,16.14 69.53,15.44 69.32,15.44 Q3.1
  Bottom 0.15: v89.75,12.05 75.69,12.05 v73.47,14.27
GND  (via drill 0.35)
  Top 0.15: J1.17 83.8,16 84.7,16.9 v87.6,16.9 | J1.8 88.3,16 v89.2,16.9 | U2.29_2 U2.29_5 | J2.B12 J2.A1
  Bottom 0.15: v87.6,16.9 v89.2,16.9
  other vias: 8,42 10,42 12,42 14,42 16,42 18,42 20,42 22,42 24,42 24,40 22,40 20,40 18,40 16,40 14,40 12,40 10,40 8,40 8,38 10,38 12,38 14,38 16,38 18,38 20,38 22,38 24,38 64,12 62,12 62,10 64,10 64,8 62,8 66,6 68,6 72,6 70,6 74,6 74,4 72,4 70,4 68,4 66,4 64,4 64,6 62,6 62,4 52,34 54,32 54,34 56,32 56,30 56,28 58,30 58,28 58,26 54,30 52,32 52,26 54,24 56,22 58,20 52,18 54,16 50,20 50,18 50,16 52,16 52,14 54,14 56,16 56,14 58,14 142,60 144,58 140,60 140,58 142,58 142,56 144,56 146,56 146,54 144,54 164,44 166,44 164,42 166,42 166,40 164,40 164,38 166,38 164,36 166,36 166,34 164,34 16,104 18,104 18,102 16,102 14,104 16,106 14,102 18,106 96,48 98,48 100,46 98,46 100,44 102,44 102,42 104,42 104,40 106,40 88,48 90,46 92,44 94,42 96,40 98,40 96,42 94,44 92,46 90,48 94,48 96,46 98,44 100,42 102,40 58,106 58,108 54,108 56,108 54,104 56,104 58,104 18,68 16,68 22,68 27,57 27,55 27,51 11.5,47 13,47 13.5,64 15.9,52.7 13.4,50.1 17.4,50.7 23.8,50.7 120,49.4 120,47.3 120,45.2 122,43.1 91.3,51.4 62,16.5 64,16.5 38.9,51.7 41.7,51.7 17.9,58.7 27.6,61.6 30.2,61.6 144,48 144,46 144,44 146,46 146,44 156,36 156,34 156,32 158,34 158,32 158,30 160,32 160,30 160,28 91.3,55.4 91.3,59 91.3,57.2 87.4,57.2 87.4,55.4 87.4,59 50.8,106.3 32.8,56.5 74,56 74,58 72,56 72,58 68,58 68,56 70,56 70,58
  pour Top: 68.04,109.94 68.02,109.92 20.13,109.92 20.1,109.94 20.08,109.96 20.07,109.98 20.07,111.12 0.08,111.12 0.08,66.28 6.48,66.29 6.48,66.29 6.5,66.29 6.52,66.29 6.52,66.29 6.52,66.29 6.53,66.28 6.54,66.27 6.54,66.27 6.54,66.27 6.55,66.26 6.56,66.25 6.56,66.25 6.56,66.25 6.57,66.24 6.58,66.23 6.58,66.23 6.58,66.23 6.58,66.21 6.58,66.19 6.58,66.19 6.58,48.09 6.58,48.07 6.58,48.07 6.58,48.07 6.57,48.06 6.56,48.05 6.56,48.05 6.56,48.05 6.55,48.04 6.54,48.03 6.54,48.03 6.54,48.03 6.53,48.02 6.52,48.01 6.52,48.01 6.52,48.01 6.5,48.01 0.08,48 0.08,0.08 76.97,0.08 76.97,10.02 76.99,10.04 77.01,10.06 77.03,10.08 95.27,10.08 95.29,10.06 95.31,10.04 95.33,10.02 95.33,0.08 170.12,0.08 170.12,67.12 92.18,67.12 92.16,67.14 92.14,67.16 92.12,67.18 92.12,111.12 68.08,111.12 68.08,109.98 68.06,109.96
  pour Bottom: 68.04,109.94 68.02,109.92 20.13,109.92 20.1,109.94 20.08,109.96 20.07,109.98 20.07,111.12 0.08,111.12 0.08,66.28 6.48,66.29 6.48,66.29 6.5,66.29 6.52,66.29 6.52,66.29 6.52,66.29 6.53,66.28 6.54,66.27 6.54,66.27 6.54,66.27 6.55,66.26 6.56,66.25 6.56,66.25 6.56,66.25 6.57,66.24 6.58,66.23 6.58,66.23 6.58,66.23 6.58,66.21 6.58,66.19 6.58,66.19 6.58,48.09 6.58,48.07 6.58,48.07 6.58,48.07 6.57,48.06 6.56,48.05 6.56,48.05 6.56,48.05 6.55,48.04 6.54,48.03 6.54,48.03 6.54,48.03 6.53,48.02 6.52,48.01 6.52,48.01 6.52,48.01 6.5,48.01 0.08,48 0.08,0.08 76.97,0.08 76.97,10.02 76.99,10.04 77.01,10.06 77.03,10.08 95.27,10.08 95.29,10.06 95.31,10.04 95.33,10.02 95.33,0.08 170.12,0.08 170.12,67.12 92.18,67.12 92.16,67.14 92.14,67.16 92.12,67.18 92.12,111.12 68.08,111.12 68.08,109.98 68.06,109.96
GPIO8  (via drill 0.3)
  Top 0.15: v19.88,45.29 19.8,45.29 19.25,44.74 R1.2 | v19.88,47.3 19.88,47.51 19.25,48.13 19.25,48.34 U2.10
  Bottom 0.15: v19.88,45.29 v19.88,47.3
I2C_PW
  Top 0.15: SENSOR2.6 157.79,10.55 156.99,11.35 SENSOR2.2 156.99,13.16 133.74,36.42 80.13,36.42 62.68,53.87 33.47,53.87 21.74,65.6 U2.17 | C1.1 157.9,9.93 SENSOR2.6 | SENSOR2.6 157.79,9.84 157.29,9.33 156.69,9.33 156.19,9.84 SENSOR2.8 | R2-PINH.2 R1_PINH.2 C1.1 | C2.1 C1.1
INT_RTC  (via drill 0.3)
  Top 0.15: 93.95,61.49 TP15.TP | 93.95,61.49 93.35,61.49 92.52,61.49 R1_PINH1.1 | v23.61,60.18 16.69,53.25 16.69,48.41 U2.8 | v87.05,62.46 87.05,61.84 86.49,61.29 U3.3 | v93.35,62.07 93.93,61.49 93.95,61.49
  Bottom 0.15: v23.61,60.18 24.03,60.18 26.32,62.46 v87.05,62.46 87.12,62.46 87.51,62.07 v93.35,62.07
IO/BOOT  (via drill 0.3, 0.35)
  Top 0.15: R_BOOT.2 20.57,108.65 21.74,108.65 22.23,109.14 BOOT_BUTTON.4 22.3,109.14 25.69,109.14 BOOT_BUTTON.3 27.11,109.15 27.61,108.65 C6.1 27.76,108.6 v29.2,108.6 | v24.31,70.57 24.31,65.93 U2.15
  Bottom 0.15: v24.31,70.57 24.31,104.78 25.13,105.6 26.2,105.6 29.9,105.6 30.9,106.6 30.9,108.1 30.4,108.6 30.3,108.6 v29.2,108.6
IO/CHANGE  (via drill 0.35)
  Top 0.15: R_CHANGE.2 52.7,107.41 59.14,107.41 59.76,108.03 60.73,108.03 60.94,108.24 60.94,109.07 60.8,109.21 50.76,109.21 CHANGE_BUTTON.3 50.69,109.14 47.3,109.14 CHANGE_BUTTON.4 46.4,109.15 45.9,108.65 C10.1 45,108.5 43.4,108.5 43.1,108.2 v43.1,107.8 | U2.23 14.13,65.93 14.13,68.79 20.64,75.3 28.74,75.3 v29.04,75.6
  Bottom 0.15: v43.1,107.8 43.1,89.66 v29.04,75.6
MISO  (via drill 0.3)
  Top 0.15: D12.2 49.03,34.97 49.03,33.17 R8.1 48.96,33.1 v48.13,33.1 | v48.13,28.05 48.13,27.84 48.96,27.01 TP6.TP | v32.62,57.82 34.14,57.82 U1.2 | v16.9,57.82 9.07,65.65 9.07,65.86 U2.27 9,65.93 9,66.27 v8.24,67.03 | v3.81,93.21 4.22,93.63 4.99,93.63 J4.P7
  Bottom 0.15: v48.13,28.05 v48.13,33.1 48.13,33.17 48.13,33.52 43.35,38.3 43.35,54.78 39.4,58.72 33.59,58.72 32.69,57.82 v32.62,57.82 v16.9,57.82 | v3.81,93.21 3.81,71.47 v8.24,67.03
MOSI  (via drill 0.3)
  Top 0.15: v84.76,14.82 84.9,14.82 85.25,15.17 85.25,15.58 J1.14 | v58.59,17.59 53.88,17.59 49.03,22.44 TP7.TP 48.96,22.51 48.96,25.28 47.64,26.59 v47.64,30.61 | R7.1 47.02,33.17 47.02,34.97 D11.2 46.95,35.04 v45.98,35.04 | v42.73,54.78 42.31,55.19 42.03,55.19 U1.5 | U2.7 15.44,48.41 15.44,48.75 v16.2,49.51 16.2,49.58 v14.4,51.38 | v4.29,87.81 4.29,88.57 4.99,89.26 J4.P3
  Bottom 0.15: v84.76,14.82 84.55,14.82 81.78,17.59 v58.59,17.59 | 42.73,50 42.73,49.51 42.73,38.3 v45.98,35.04 45.98,34.97 47.64,33.31 v47.64,30.61 | 42.73,50 v42.73,54.78 | v4.29,87.81 4.29,71.61 14.4,61.49 v14.4,51.38 | 42.73,50 42.24,49.51 v16.2,49.51
N$1
  Top 0.15: R_CAPACITOR.2 87.19,63.5 87.19,65.16 D7.1
N$3
  Top 0.15: C_DELAY.1 53.6,100.07 52.91,100.07 51.66,101.31 IC1.5
N$4
  Top 0.15: R2_BAT.2 126.03,47.02 126.03,49.51 MCP73831.5
N$5
  Top 0.15: C4.1 96.6,31.16 95.08,31.16 94.67,30.75 D4.1 94.62,31.51 94.31,31.88 85.71,31.88 83.79,33.79 81.99,33.79 D3.2
N$6  (via drill 0.3)
  Top 0.15: v122.36,38.16 121.74,37.53 C1_BAT1.1 | D2.1 121.12,39.68 121.19,39.61 v121.95,39.61 122.02,39.61 122.3,39.89 123.82,39.89 IC4.3 124.03,39.96 124.58,40.51 124.58,41.27 124.03,41.83 123.89,41.83 IC4.1 | v134.21,46.4 135.25,46.4 Q1.2
  Bottom 0.15: 122.36,38.5 122.36,39.1 122.36,39.2 v121.95,39.61 | 122.36,38.5 v122.36,38.16 | v134.21,46.4 130.24,46.4 122.93,39.1 122.36,38.53 122.36,38.5
N$7  (via drill 0.3)
  Top 0.15: v123.06,48.89 122.36,49.58 R1_BAT.1 | v128.81,48.89 128.81,49.44 128.74,49.51 MCP73831.1
  Bottom 0.15: v128.81,48.89 128.41,48.49 123.46,48.49 v123.06,48.89
N$8
  Top 0.15: CHG_LED.C 123.68,51.31 123.27,51.31 122.64,51.94 119.18,51.94 118.9,51.66 118.9,42.31 118.62,42.03 118.62,41.2 118.83,41 120.77,41 120.98,41.2 121.6,41.2 123.61,43.21 123.61,49.58 R1_BAT.2
N$9
  Top 0.15: J1.4 90.23,15.58 90.23,14.4 89.06,13.23 80.19,13.23 79.08,14.34 76.24,14.34 72.85,17.73 EPD_C1.1
N$10  (via drill 0.3)
  Top 0.15: v89.75,14.54 89.75,15.58 J1.5 | v89.75,13.3 v89.74,13.3 89.33,12.88 v79.92,12.88 | v77.97,14.82 77.08,14.82 74.17,17.73 EPD_C2.1
  Bottom 0.15: v89.75,13.3 v89.75,14.54 | v77.97,14.82 v79.92,12.88
N$12
  Top 0.15: J1.18 83.31,15.65 83.31,16 84.69,17.38 87.6,17.38 88.71,18.49 EPD_C6.1
N$13
  Top 0.15: J1.19 82.82,15.65 82.82,16 84.48,17.66 86.49,17.66 87.32,18.49 EPD_C7.1
N$14
  Top 0.15: J1.20 82.34,15.65 82.34,16 84.28,17.94 85.32,17.94 85.87,18.49 EPD_C8.1
N$16
  Top 0.15: J1.22 81.37,15.65 81.37,16.76 83.1,18.49 EPD_C10.1
N$18
  Top 0.15: J1.24 80.26,15.65 EPD_C12.1
N$22
  Top 0.15: R2-USB1.2 158.58,53.6 162.88,53.6 163.41,53.06 164.48,53.06 J2.A5
N$28  (via drill 0.3)
  Top 0.15: v156.3,55.61 151.94,51.24 R2-USB.1 | v163.5,55.61 163.91,56.02 164.47,56.02 J2.B5
  Bottom 0.15: v163.5,55.61 v156.3,55.61
PREVGH  (via drill 0.3)
  Top 0.15: J1.21 81.85,15.65 81.85,16 84.35,18.49 84.48,18.49 EPD_C9.1 84.55,18.49 v85.25,19.18 | v91.2,25.14 91.2,26.32 D5.1
  Bottom 0.15: v85.25,19.18 v91.2,25.14
PREVGL  (via drill 0.3)
  Top 0.15: J1.23 80.81,15.65 80.81,17.66 81.65,18.49 EPD_C11.1 81.72,18.49 v82.41,19.18 | v90.16,30.47 90.37,30.68 91.06,30.68 D4.2
  Bottom 0.15: v90.16,30.47 90.16,26.94 v82.41,19.18
RESE
  Top 0.15: J1.3 90.79,15.58 90.79,13.71 88.43,11.36 74.03,11.36 73.2,10.53 68.63,10.53 68.29,10.86 68.29,13.3 70.36,15.37 70.57,15.37 Q3.2 70.57,15.3 72.71,13.16 72.71,12.95 R3.1
RESE'
  Top 0.15: 70.15,12.6 71.47,12.6 72.44,11.63 72.71,11.63 R3.2 | 70.15,12.6 69.46,13.3 R2.2 | SJ1.2 69.32,11.56 69.32,11.84 70.08,12.6 70.15,12.6
RESET  (via drill 0.3)
  Top 0.15: C5.1 67.38,108.65 66.27,108.65 65.79,109.14 RESET_BUTTON.3 65.72,109.14 62.33,109.14 RESET_BUTTON.4 62.24,109.15 61.29,108.2 61.29,107.89 60.88,107.48 R_RESET.2 57.77,104.9 52.7,104.9 52.41,104.9 v51.38,103.88 48.89,101.38 IC1.1 | v22.64,61.15 10.32,48.82 U2.3
  Bottom 0.15: v22.64,61.15 22.64,68.28 51.38,97.02 51.38,103.81 v51.38,103.88
RTC_RST
  Top 0.15: U2.16 23.06,65.86 23.06,64.75 33.52,54.29 78.53,54.29 85.11,60.87 85.11,61.22 U3.4
RX
  Top 0.15: U2.24 12.88,65.93 12.88,69.87 16.48,73.47 TP2.TP
SCK  (via drill 0.3)
  Top 0.15: v85.52,14.82 85.73,15.03 85.73,15.58 J1.13 | v49.86,32.13 49.44,32.55 44.6,32.55 44.04,33.1 R6.1 44.04,33.17 44.04,35.04 D10.2 | v43.84,54.78 43.77,54.78 42.03,56.51 U1.6 41.97,56.51 v41.34,55.88 | v15.3,49.86 14.13,48.68 U2.6 | v3.81,69.46 3.81,90.79 4.43,91.41 4.99,91.41 J4.P5 | v48.75,31.09 43.63,31.09 41.62,33.1 39.61,33.1 TP8.TP
  Bottom 0.15: v85.52,14.82 85.39,14.82 82.34,17.87 64.13,17.87 v49.86,32.13 | v43.84,54.78 43.94,54.68 43.94,38.13 49.86,32.2 v49.86,32.13 | v41.34,55.88 35.39,49.93 32.13,49.93 32.06,50 16.07,50 15.93,49.86 v15.3,49.86 15.23,49.86 14.89,49.51 7.69,49.51 7.34,49.86 7.34,65.93 v3.81,69.46 | v48.75,31.09 49.79,32.13 v49.86,32.13
SCL  (via drill 0.3)
  Top 0.15: R2-PINH.1 155.74,6.51 156.57,5.68 159.69,5.68 160.24,6.23 160.24,11.36 158.65,12.95 SENSOR2.4 158.65,13.02 158.65,14.7 v158.64,14.71 | v141.96,51.73 140.51,51.73 U4.7 | v165.3,28.18 165.3,20.84 J3.4 | v17.94,64.19 17.94,65.86 U2.20 | v88.36,53.12 88.36,52.56 88.92,52.01 U3.16
  Bottom 0.15: v17.94,64.19 18.33,63.8 18.34,63.8 23.07,59.07 23.75,59.07 25.21,60.52 80.95,60.52 v88.36,53.12 88.43,53.12 140.99,53.12 141.75,52.35 141.75,51.8 141.75,51.73 141.82,51.73 v141.96,51.73 165.3,28.39 v165.3,28.18 165.3,21.54 158.64,14.89 v158.64,14.71
SDA  (via drill 0.3)
  Top 0.15: R1_PINH.1 156.85,6.51 157.41,5.96 159.55,5.96 159.97,6.37 159.97,10.53 157.82,12.67 157.82,12.95 SENSOR2.3 157.82,13.02 v157.82,14.69 | v141.27,52.22 140.51,52.22 U4.8 | v162.25,22.28 164.72,19.8 165.3,19.8 J3.3 | v26.25,59 26.25,59.21 25.21,60.25 24.58,60.25 19.25,65.58 19.25,65.86 U2.19 | v86.63,53.32 87.29,52.66 87.67,52.28 87.67,52.2 | 87.67,52.2 87.67,52.01 U3.15 | v91.3,52.22 89.92,53.6 88.3,53.6 88,53.6 87.8,53.4 87.67,53.27 87.67,52.2
  Bottom 0.15: v157.82,14.69 162.25,19.11 v162.25,22.28 141.47,43.06 141.47,52.01 v141.27,52.22 141.2,52.22 v91.3,52.22 | v26.25,59 80.95,59 v86.63,53.32
SRC
  Top 0.3: Q3.3 66.79,17.49 66.6,17.3 66.1,16.8 66.1,10.6 66.1,10.5 68.3,8.3 73.8,8.3 73.9,8.4 76.2,10.7 95.1,10.7 96.5,12.1 96.5,24.9 95.8,25.6 95.06,26.34 D5.2 96.6,28.2 96.6,29.12 96.6,29.22 96.6,29.32 96.6,29.42 96.6,29.92 | C4.2 96.6,29.92 | L1.1 87.47,30.89 89.74,28.62 89.75,28.6 95.3,28.6 C4.2 96.6,29.92
SS_SD  (via drill 0.3)
  Top 0.15: v9.31,101.26 8.81,101.76 8.31,101.76 8.13,101.58 R10.1 | v9.28,97.99 11.91,97.99 12.53,98.61 D8.2 | v6.16,88.92 6.09,88.92 5.4,88.22 J4.P2 | v14.89,52.77 11.63,49.51 11.63,48.41 U2.4
  Bottom 0.15: v9.31,101.26 9.88,100.69 9.88,98.59 v9.28,97.99 7.75,97.99 6.16,96.4 v6.16,88.92 6.16,88.85 14.89,80.12 v14.89,52.77
TX
  Top 0.15: U2.25 11.56,65.93 11.56,73.47 TP1.TP
USB_D+  (via drill 0.3)
  Top 0.15: v152.7,51.24 154.29,51.24 D1.1 | v31.3,57.13 v35.46,61.29 | v25.55,51.38 25.55,49.65 24.31,48.41 U2.14
  Bottom 0.15: v152.7,51.24 143.28,51.24 133.24,61.29 v35.46,61.29 | v25.55,51.38 v31.3,57.13
USB_D-  (via drill 0.3)
  Top 0.15: v153.32,49.65 153.6,49.38 154.29,49.38 D1.3 | v24.38,51.38 24.78,50.98 24.78,50.4 23.06,48.68 23.06,48.41 U2.13
  Bottom 0.15: v153.32,49.65 153.32,51.24 141.62,62.95 25.37,62.95 23.08,60.66 22.29,60.66 18.27,64.68 17.2,64.68 16.41,63.9 16.41,57.69 16.71,57.38 18.38,57.38 v24.38,51.38
VBAT
  Top 0.3: MCP73831.3 128.74,51.38 131.44,51.38 132.27,50.55 C2_BAT.1 132.41,50.48 134.34,48.54 Q1.3 134.48,48.61 137.12,51.24 137.12,51.25 U4.3 U4.2 138.13,51.75 137.4,52.48 137.4,52.5 137.4,60.59 137.5,60.69 140,63.19 150,63.19 TP3.TP
VBUS
  Top 0.3: D1.5 156.78,50.28 156.44,50.28 155.95,49.79 155.95,48.34 156.35,47.94 C4_USB.1 C5_USB.1 156.35,45.69 153.46,42.8 152.42,42.8 PFMF.050.1.2 | TP14.TP 152.28,37.74 152.28,42.66 PFMF.050.1.2 | R1_PWRUSB.2 119.39,41.62 120.84,41.62 121.05,41.83 D2.2 121.09,49.82 119.66,51.24 | 119.66,51.24 121.05,51.24 CHG_LED.A 122.36,51.18 122.57,51.18 123.2,50.55 125.76,50.55 125.97,50.76 126.1,50.83 | 119.66,51.24 C1_BAT.1 | 126.1,50.83 130.47,46.47 133.38,46.47 Q1.1 133.51,46.33 137.12,42.73 152.14,42.73 PFMF.050.1.2 | 126.1,50.83 126.1,51.38 MCP73831.4
VRTC
  Top 0.3: R_CAPACITOR.1 85.87,63.43 85.87,62.39 85.8,62.33 85.8,52.63 86.42,52.01 U3.14 86.49,51.8 86.49,50.62 | 86.49,50.62 86.49,48.96 C8.1 | C10_SUPERCAP.2 95.15,51.73 93.42,51.73 92.31,50.62 86.63,50.62 86.49,50.62
VUSB
  Top 0.3: J2.A9 164.47,56.78 164.47,56.58 J2.B4 164.61,56.51 165.16,56.51 165.37,56.3 165.37,52.28 165.16,52.08 164.61,52.08 J2.B9 164.47,52.01 164.47,51.8 J2.A4 164.33,51.73 163.78,51.73 156.85,44.8 156.85,42.73 PFMF.050.1.1

## Text on the board
tNames: GND | TX | RX | EPD_RST | EPD_3V3_C | INT_RTC | VBAT | GND | VBUS | SCK | EPD_BUSY | MISO | EPD_3V3 | MOSI | EPD_CS | EPD_DC | 3V3